# EAGLE board irDA (EAGLE 7.7.0)
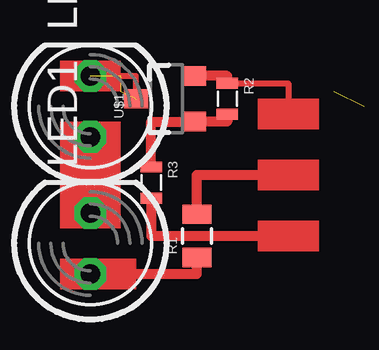
[diagram p0: board, top side]

No outline drawn. Coordinates in mm, seen from the top.
Copper layers (1*16): Top 0.035mm / dielectric 1.5mm / Bottom 0.035mm
Design rules "default": minimum track width 10mil, minimum drill 24mil, track to track 8mil, track to pad 8mil, pad to pad 8mil, via to via 8mil, smd to smd 8mil, copper to edge 40mil, drill to drill 8mil, minimum pad ring 10mil, minimum via ring 8mil, stop-mask expansion 4mil, vias tented up to drill 0mil, thermal gap 10mil

## Footprints (pad centres in the part's own frame; a part is rotated, then mirrored left to right if it is on the bottom)
LED5MM = drill 0.813 octagon: A -1.27,0; K 1.27,0
R0805 = smd 0.8 x 1.2: 1 -0.9,0; 2 0.9,0
0603 = smd 0.45 x 0.9: 1 -0.65,0; 2 0.65,0
SOT23 = smd 0.8 x 1: 1 -0.95,-1.159; 2 0.95,-1.159; 3 0,1.259

## Placement (x,y rotation side)
LED1  [LED5MM]  1.27,1.91 90 top
LED2  [LED5MM]  1.27,7.62 90 top
R1  50  [R0805]  5.71,2.22 90 top
R2  10k  [0603]  6.99,7.94 270 top
R3  100  [0603]  3.81,4.45 270 top
U$1  2N7002  [SOT23]  4.45,7.94 90 top

## Library data of the parts
LED1 LED2 = led
R1-R3 U$1 = smalsmd

## Nets
GND: R2.1 U$1.2
MCU: R3.2
N$1: LED1.K LED2.A
N$3: LED2.K U$1.3
N$5: LED1.A R1.1
N$7: R2.2 R3.1 U$1.1
VCC: R1.2

## Tracks (layer width: path | path; a pad name or v marks a point on that pad's centre or on a via)
GND
  Top 0.406: R2.1 6.99,8.89 U$1.2
N$1
  Top 0.406: LED2.A LED1.K
N$3  (3 unrouted)
N$4
  Top 0.406: 3.81,3.81 3.81,2.22 10.16,2.22
N$5
  Top 0.406: LED1.A 5.71,0.64 R1.1
N$6  (1 unrouted)
N$7
  Top 0.406: R2.2 6.99,6.99 U$1.1 3.81,6.99 R3.1
N$9
  Top 0.254: 2.86,7.94 3.17,7.94 3.17,8.89 0.95,8.89
N$10
  Top 0.254: 6.99,8.57 9.53,8.57 9.53,7.3
VCC
  Top 0.406: R1.2 5.71,4.76 8.26,4.76
(copper drawn outside any net)
  shapes: Top area x10